# Altium PCB PCB1.PcbDoc
Units mm, origin at the board's own origin, x right, y up, seen from the top; angles counter-clockwise.
Board outline 80.01 x 80.01 mm, 2 copper layers (Top Layer, Bottom Layer); 95 components, 52 nets, 287 pads, 0 vias.
Unrouted connection lines stored in the file: 209.
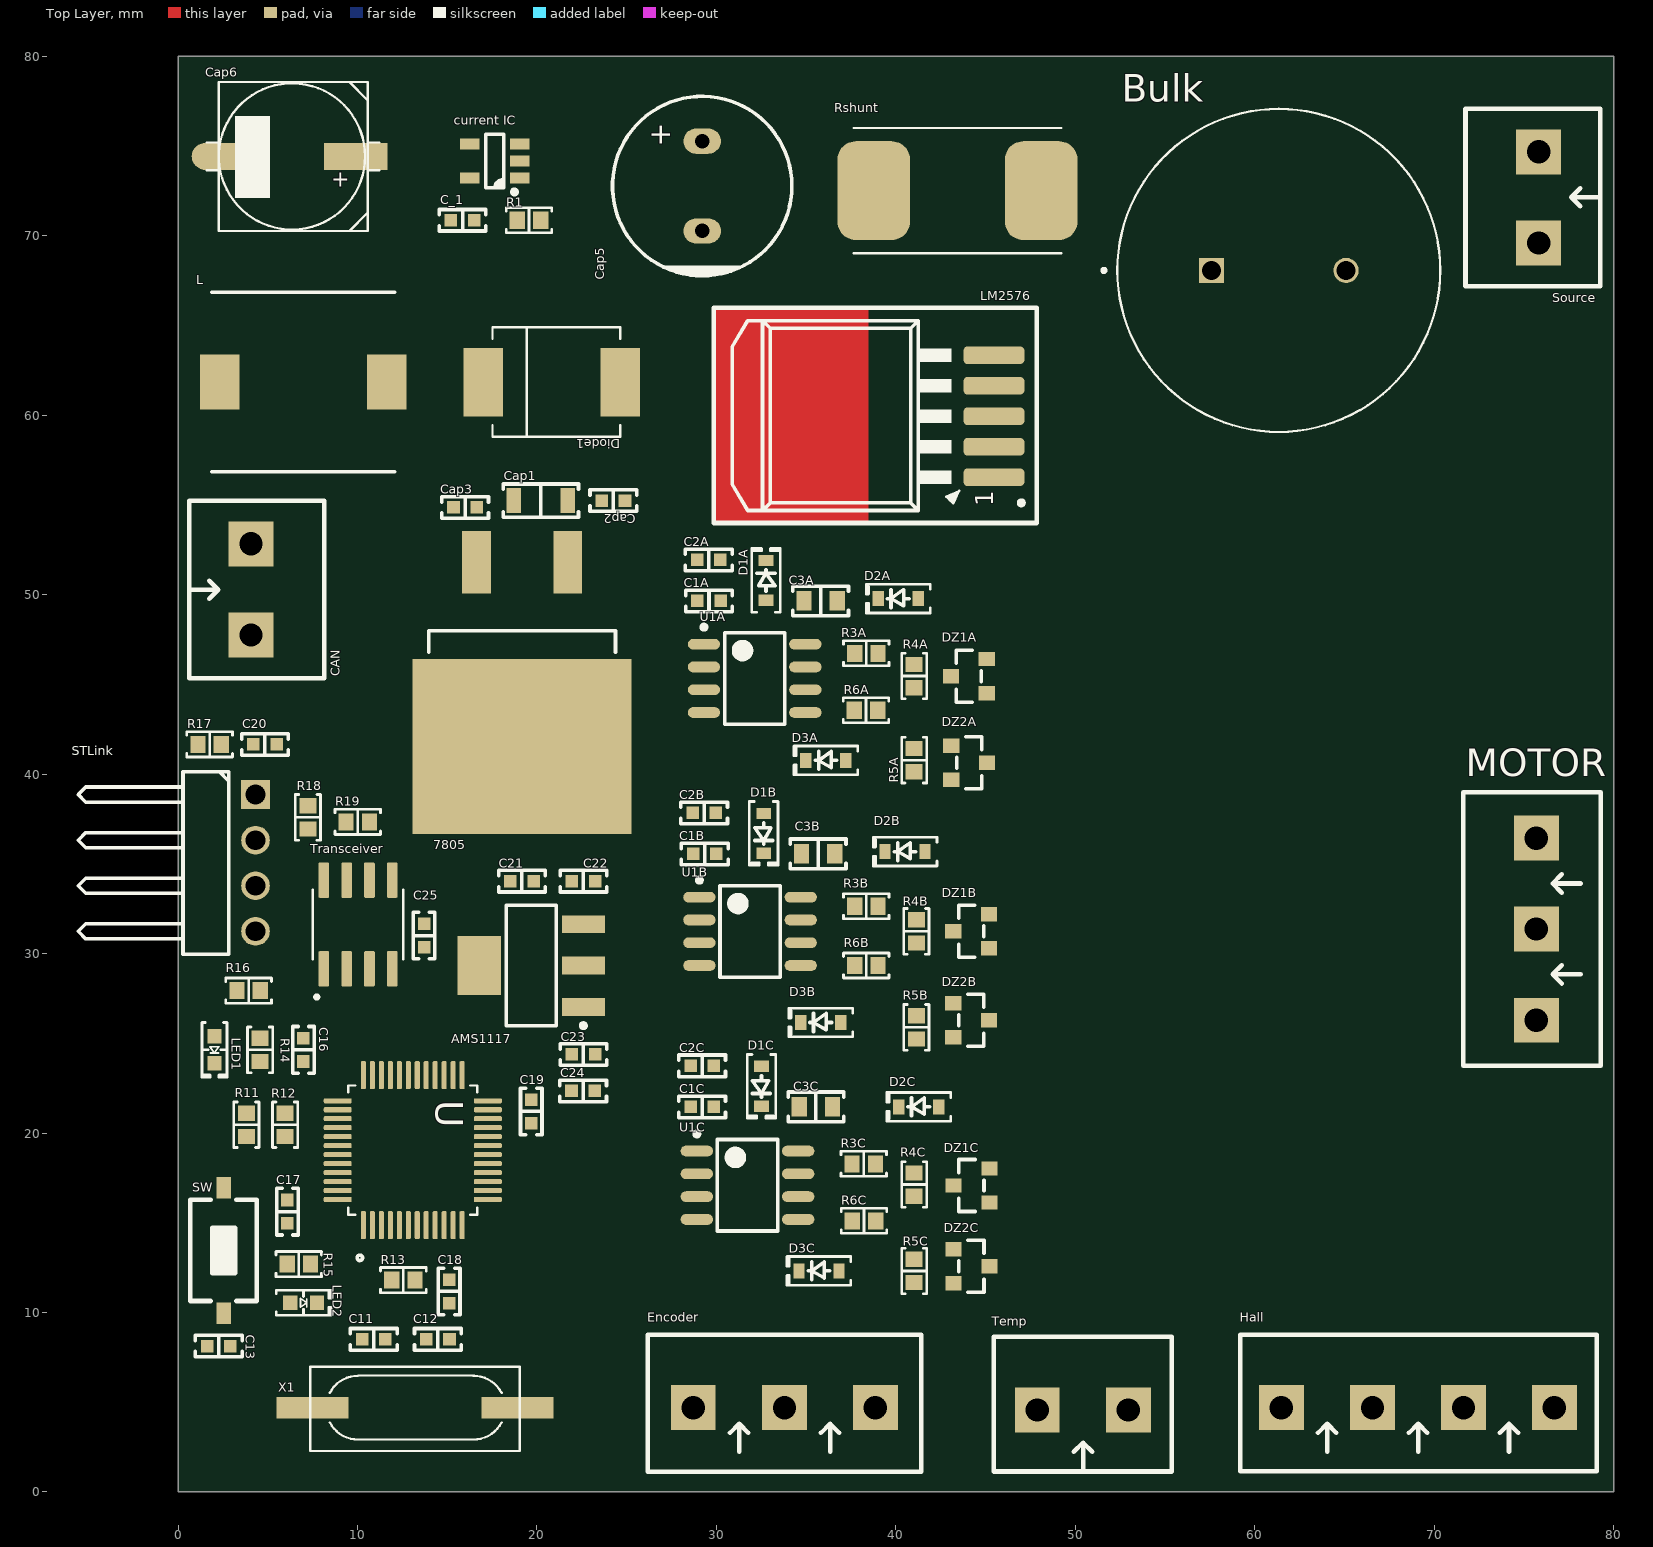
[diagram p0: Top Layer view]
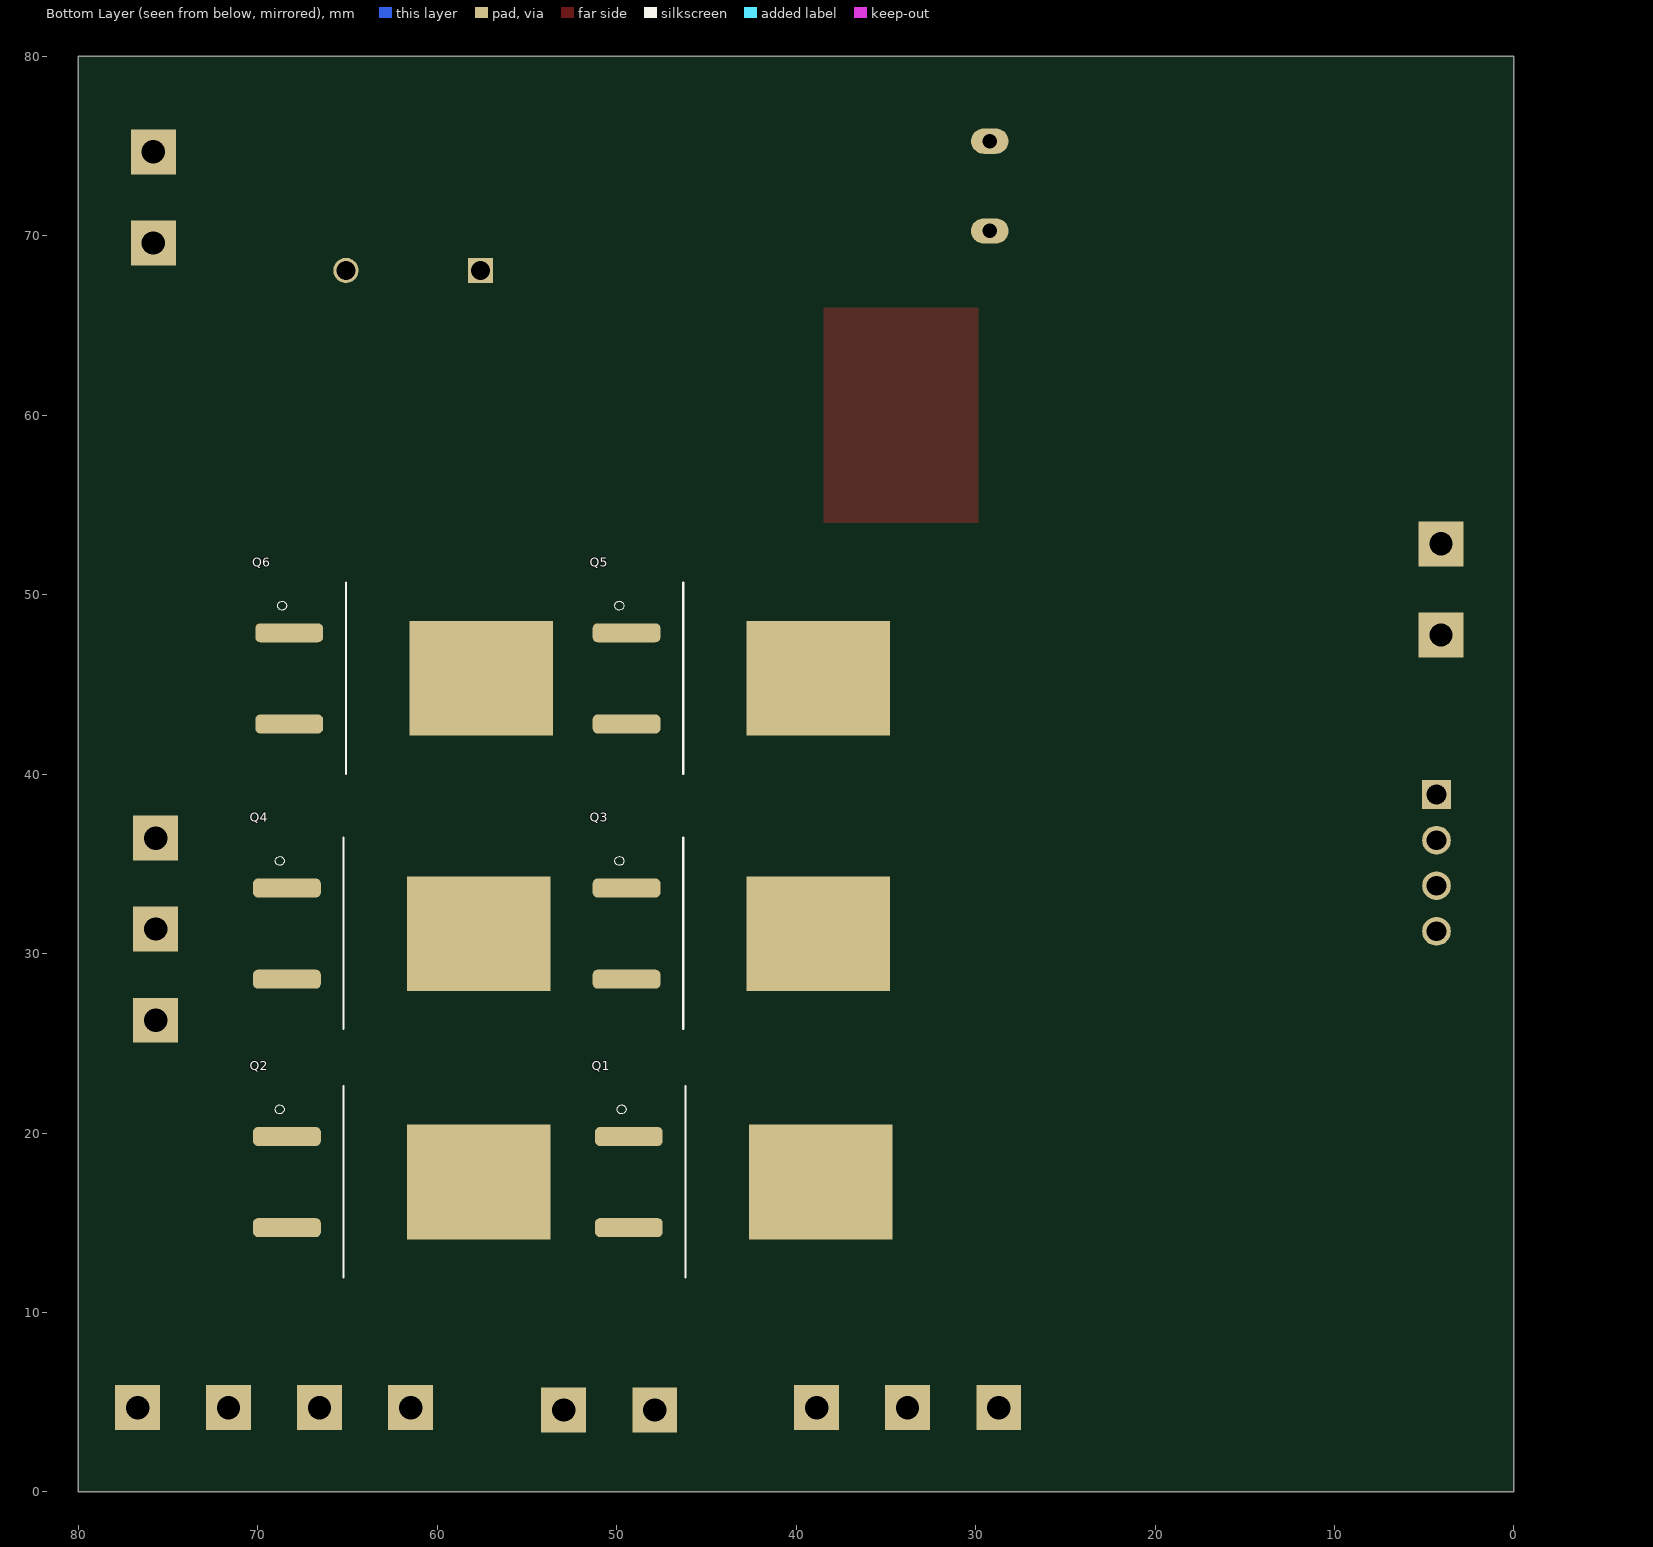
[diagram p1: Bottom Layer view, seen from below]

## Layer stack, top to bottom
Top Solder: solder mask 0.0102, Solder Resist, Dk 3.5
Top Layer: signal copper 0.0356
Dielectric 1: dielectric 0.32, FR-4, Dk 4.8
Bottom Layer: signal copper 0.0356
Bottom Solder: solder mask 0.0102, Solder Resist, Dk 3.5

## Board outline
0,0 80.01,0 80.01,80.01 0,80.01

## Design rules (kind name [scope] priority, off if disabled: settings)
Clearance [All] p1: gap=0.254 ignorepadtopadclearanceinfootprint=TRUE except(0: Arc-Hole Track-Hole SMDPad-Hole THPad-Hole Via-Hole Fill-Hole Poly-Hole Region-Hole Text-Hole)
DiffPairsRouting [All] p1: maxlimit=0.254 minlimit=0.254 mostfreqgap=0.254 toplayer_minwidth=0.381 toplayer_maxwidth=0.381 toplayer_prefwidth=0.381 bottomlayer_minwidth=0.381 bottomlayer_maxwidth=0.381 bottomlayer_prefwidth=0.381 maxuncoupledlength=12.7
PolygonConnect [All] p1: connectstyle=Relief reliefconductorwidth=0.254 reliefentries=4 polygonreliefangle="90 Angle" airgapwidth=0.254
RoutingVias [All] p1: holewidth=0.711 width=1.27 viastyle="Through Hole" minholewidth=0.711 minwidth=1.27 maxholewidth=0.711 maxwidth=1.27
SolderMaskExpansion [All] p1: expansion=0.102
Width [All] p1: maxlimit=0.254 minlimit=0.254 preferedwidth=0.254
29 further rules are at their usual default settings.

## Classes and differential pairs
differential pair class CAN_DIFF: CAN
channel class IC_driver: U_IC_driver1 U_IC_driver2 U_IC_driver3
component class U_Motor: Bulk C_1 "current IC" Encoder Hall MOTOR Q1 Q2 Q3 Q4 Q5 Q6 R1 Rshunt Temp
component class U_MCU: AMS1117 C11 C12 C13 C16 C17 C18 C19 C20 C21 C22 C23 C24 C25 CAN LED1 LED2 R11 R12 R13 R14 R15 R16 R17 R18 R19 STLink SW Transceiver U X1
component class U_IC_driver3: C1C C2C C3C D1C D2C D3C DZ1C DZ2C R3C R4C R5C R6C U1C
component class U_IC_driver2: C1B C2B C3B D1B D2B D3B DZ1B DZ2B R3B R4B R5B R6B U1B
component class U_IC_driver1: C1A C2A C3A D1A D2A D3A DZ1A DZ2A R3A R4A R5A R6A U1A
component class Main: 7805 Cap1 Cap2 Cap3 Cap5 Cap6 Diode1 L LM2576 Source
differential pair CAN: +CAN_P -CAN_N

## Components (designator, comment, footprint, x,y, rotation, side; value= is the part's Value field where it differs from the comment)
7805 "L7805CD2T-TR" STMicroelectronics_D²PAK_0079457_22_MFG 19.177,43.307 r180 top (schematic designator IC1)
AMS1117 "LM1117" SOT223-4N 19.685,29.337 r180 top value=LM317
Bulk "1000uF/100V" CAPPRD750W80D1800H3550 61.341,68.072 r0 top
C1A "104" "CAP FILM 0603_1608" 29.591,49.657 r180 top value=0,1uF/300V (schematic designator C1)
C1B "104" "CAP FILM 0603_1608" 29.352,35.56 r180 top value=0,1uF/300V (schematic designator C1)
C1C "104" "CAP FILM 0603_1608" 29.21,21.463 r0 top value=0,1uF/300V (schematic designator C1)
C2A "104" "CAP FILM 0603_1608" 29.576,51.943 r180 top value=0,1uF/300V (schematic designator C2)
C2B "104" "CAP FILM 0603_1608" 29.322,37.846 r180 top value=0,1uF/300V (schematic designator C2)
C2C "104" "CAP FILM 0603_1608" 29.21,23.749 r0 top value=0,1uF/300V (schematic designator C2)
C3A "10uF" "CAP FILM 0805" 35.814,49.657 r0 top (schematic designator C3)
C3B "10uF" "CAP FILM 0805" 35.672,35.56 r0 top (schematic designator C3)
C3C "10uF" "CAP FILM 0805" 35.545,21.463 r0 top (schematic designator C3)
C11 "22pF" "CAP FILM 0603_1608" 10.907,8.509 r0 top value=33p
C12 "22pF" "CAP FILM 0603_1608" 14.478,8.509 r180 top value=33p
C13 "104" "CAP FILM 0603_1608" 2.271,8.128 r0 top value=0,1uF/300V
C16 "104" "CAP FILM 0603_1608" 6.985,24.638 r90 top value=0,1uF/300V
C17 "104" "CAP FILM 0603_1608" 6.096,15.621 r90 top value=0,1uF/300V
C18 "104" "CAP FILM 0603_1608" 15.113,11.176 r270 top value=0,1uF/300V
C19 "104" "CAP FILM 0603_1608" 19.685,21.209 r270 top value=0,1uF/300V
C20 "104" "CAP FILM 0603_1608" 4.841,41.656 r180 top value=0,1uF/300V
C21 "4.7uF" "CAP FILM 0603_1608" 19.162,34.036 r180 top value=0,1uF/300V
C22 "1uF" "CAP FILM 0603_1608" 22.591,34.036 r0 top value=0,1uF/300V
C23 "4.7uF" "CAP FILM 0603_1608" 22.591,24.384 r180 top value=0,1uF/300V
C24 "1uF" "CAP FILM 0603_1608" 22.576,22.352 r180 top value=0,1uF/300V
C25 "104" "CAP FILM 0603_1608" 13.716,31.003 r270 top value=0,1uF/300V
C_1 "104" "CAP FILM 0603_1608" 15.86,70.866 r0 top value=0,1uF/300V
CAN "KF2" KF2-5.08 4.064,50.292 r90 top
Cap1 "100uF/50V" "CAP FILM 1206" 20.217,55.245 r180 top
Cap2 "104" "CAP FILM 0603_1608" 24.257,55.245 r180 top value=0.1uF
Cap3 "104" "CAP FILM 0603_1608" 16.002,54.864 r0 top value=0.1uF
Cap5 "150uF/100V" "CAP TH ALUM ELEC D10.00mm S5.00mm H20.00mm" 29.21,72.771 r90 top
Cap6 "330uF/25V" CAP-ALU-SMD-F 6.35,74.422 r180 top
"current IC" "INA139" "MICROCHIP SOT-23-5 OT" 17.65,74.168 r180 top
D1A "1N4148" SOD323 32.766,50.8 r90 top value=1N5007 (schematic designator D1)
D1B "1N4148" SOD323 32.639,36.703 r270 top value=1N5007 (schematic designator D1)
D1C "1N4148" SOD323 32.512,22.606 r270 top value=1N5007 (schematic designator D1)
D2A "1N4148" SOD323 40.132,49.784 r180 top value=1N5007 (schematic designator D2)
D2B "1N4148" SOD323 40.513,35.687 r180 top value=1N5007 (schematic designator D2)
D2C "1N4148" SOD323 41.275,21.463 r180 top value=1N5007 (schematic designator D2)
D3A "1N4148" SOD323 36.099,40.767 r180 top value=1N5007 (schematic designator D3)
D3B "1N4148" SOD323 35.814,26.162 r180 top value=1N5007 (schematic designator D3)
D3C "1N4148" SOD323 35.718,12.319 r180 top value=1N5007 (schematic designator D3)
Diode1 "1N5822" DIO-SMD-B 20.828,61.849 r0 top value=1N5007
DZ1A "DIODE Zener" "DIODES SOT-23-3" 44.069,45.466 r180 top (schematic designator DZ1)
DZ1B "DIODE Zener" "DIODES SOT-23-3" 44.196,31.242 r180 top (schematic designator DZ1)
DZ1C "DIODE Zener" "DIODES SOT-23-3" 44.212,17.079 r180 top (schematic designator DZ1)
DZ2A "DIODE Zener" "DIODES SOT-23-3" 44.085,40.64 r0 top (schematic designator DZ2)
DZ2B "DIODE Zener" "DIODES SOT-23-3" 44.196,26.289 r0 top (schematic designator DZ2)
DZ2C "DIODE Zener" "DIODES SOT-23-3" 44.212,12.573 r0 top (schematic designator DZ2)
Encoder "KF3" KF3-5.08 28.715,4.699 r0 top
Hall "KF4" KF4-5.08 61.481,4.699 r0 top
L "100uH/3A" INDPM102100X400N 6.985,61.849 r0 top
LED1 "LED SMD" "LED 0603_1608 GREEN" 2.032,24.638 r270 top
LED2 "LED SMD" "LED 0603_1608 GREEN" 6.997,10.541 r0 top
LM2576 "LM2576" TO263 39.497,59.563 r90 top (schematic designator IC2)
MOTOR "KF3" KF3-5.08 75.692,26.289 r90 top
Q1 "IRFZ44" DPAK508P1524X483-3N 42.926,17.272 r270 bottom
Q2 "IRFZ44" DPAK508P1524X483-3N 61.976,17.272 r270 bottom
Q3 "IRFZ44" DPAK508P1524X483-3N 43.053,31.115 r270 bottom
Q4 "IRFZ44" DPAK508P1524X483-3N 61.976,31.115 r270 bottom
Q5 "IRFZ44" DPAK508P1524X483-3N 43.053,45.339 r270 bottom
Q6 "IRFZ44" DPAK508P1524X483-3N 61.849,45.339 r270 bottom
R1 "100k" "RES 0603_1608" 19.558,70.866 r0 top value="R1/4W - 1K"
R3A "10" "RES 0603_1608" 38.354,46.736 r0 top value="R1/4W - 1K" (schematic designator R3)
R3B "10" "RES 0603_1608" 38.354,32.639 r0 top value="R1/4W - 1K" (schematic designator R3)
R3C "10" "RES 0603_1608" 38.212,18.288 r0 top value="R1/4W - 1K" (schematic designator R3)
R4A "4.7k" "RES 0603_1608" 41.021,45.466 r90 top value="R1/4W - 1K" (schematic designator R4)
R4B "4.7k" "RES 0603_1608" 41.148,31.242 r90 top value="R1/4W - 1K" (schematic designator R4)
R4C "4.7k" "RES 0603_1608" 41.021,17.13 r90 top value="R1/4W - 1K" (schematic designator R4)
R5A "10" "RES 0603_1608" 41.021,40.782 r90 top value="R1/4W - 1K" (schematic designator R5)
R5B "10" "RES 0603_1608" 41.148,25.893 r90 top value="R1/4W - 1K" (schematic designator R5)
R5C "10" "RES 0603_1608" 41.021,12.319 r90 top value="R1/4W - 1K" (schematic designator R5)
R6A "4.7k" "RES 0603_1608" 38.339,43.561 r180 top value="R1/4W - 1K" (schematic designator R6)
R6B "4.7k" "RES 0603_1608" 38.354,29.337 r180 top value="R1/4W - 1K" (schematic designator R6)
R6C "4.7k" "RES 0603_1608" 38.227,15.113 r180 top value="R1/4W - 1K" (schematic designator R6)
R11 "10k" "RES 0603_1608" 3.81,20.462 r270 top value="R1/4W - 1K"
R12 "10k" "RES 0603_1608" 5.969,20.462 r90 top value="R1/4W - 1K"
R13 "1M" "RES 0603_1608" 12.558,11.811 r180 top value="R1/4W - 1K"
R14 "10k" "RES 0603_1608" 4.572,24.638 r270 top value="R1/4W - 1K"
R15 "10k" "RES 0603_1608" 6.731,12.7 r180 top value="R1/4W - 1K"
R16 "10k" "RES 0603_1608" 3.937,27.94 r180 top value="R1/4W - 1K"
R17 "10k" "RES 0603_1608" 1.763,41.656 r0 top value="R1/4W - 1K"
R18 "10k" "RES 0603_1608" 7.239,37.592 r270 top value="R1/4W - 1K"
R19 "120" "RES 0603_1608" 10.018,37.338 r0 top value="R1/4W - 1K"
Rshunt "1mOhms/3W" RESM11569X253N 43.434,72.517 r0 top
Source "KF2" KF2-5.08 75.819,72.136 r270 top
STLink "JP4" JP4-D1C 1.778,29.972 r270 top
SW "" SW1-SMD 2.54,13.462 r270 top value="SW chip 2 pin"
Temp "KF2" KF2-5.08 50.419,4.572 r180 top
Transceiver "SN65HVD230QDR" SOIC127P599X175-8N 10.033,31.623 r90 top
U "STM32F103C8T6" QFP50P900X900X160-48N 13.081,19.05 r90 top
U1A "IR2101" SO8 32.131,45.339 r0 top (schematic designator U1)
U1B "IR2101" SO8 31.877,31.242 r0 top (schematic designator U1)
U1C "IR2101" SO8 31.735,17.094 r0 top (schematic designator U1)
X1 "8Mhz" XTAL-RU49/4 18.161,4.699 r180 top value=4Mhz

## Footprints (in the part's own frame and the unit in brackets; to place one, negate y for a bottom-side part, rotate by r counter-clockwise, add the part's x,y. Pads: shape width x height; smd on the part's side, far side on the other; paste and mask are expansions set on the pad)
"CAP FILM 0603_1608" [mm] "Chip Capacitor, 2-Leads, Body 1.60x0.80mm, IPC Medium Density"
  rect 0.7x0.7 smd: 1(-0.65,0) 2(0.65,0)
  silkscreen extent -1.3,-0.6 1.3,0.6, body extent -0.8,-0.4 0.8,0.4, height 0.7
"CAP FILM 0805" [mm] "J2, Film Capacitor PPS , 2-Leads, Body 2.00x1.25mm, IPC Medium Density"
  rect 0.85x1.1 smd: 1(-0.925,0) 2(0.925,0)
  silkscreen extent -1.55,-0.82 1.55,0.82, body extent -1,-0.62 1,0.62, height 1.2
"CAP FILM 1206" [mm] "H1, Film Capacitor PPS, 2-Leads, Body 3.20x1.60mm, IPC Medium Density"
  rect 0.8x1.4 smd: 1(-1.5,0) 2(1.5,0)
  silkscreen extent -2.1,-0.92 2.1,0.92, body extent -1.6,-0.8 1.6,0.8, height 1
"CAP TH ALUM ELEC D10.00mm S5.00mm H20.00mm" [mm] "10mm Diameter 5mm Lead Spacing Aluminum Electrolytic Capacitors Radial, Can"
  oval 1.4x2.1 hole 0.8: 1(2.5,0) 2(-2.5,0)
  silkscreen extent -5,-5 5,5, body extent -5.01,-5 5,5, height 20
CAP-ALU-SMD-F [mil]
  rect 140x59.06 smd: 1(-140,0)
  oval 140x59.06 smd: 2(150,0)
  silkscreen extent -192,-163 187,163, body extent -195,-163 195,163, height 402
CAPPRD750W80D1800H3550 [mm]
  round 1.4 hole 1.05: N(3.75,0)
  rect 1.4x1.4 hole 1.05: P(-3.75,0)
  silkscreen extent -9.85,-9 9,9, body extent -9,-9 9,9, height 35.5
DIO-SMD-B [mm] "Magnetic-Core Inductor with Winding Polarity Marking; 2 Leads"
  rect 2.2x3.81 smd: 1(3.81,0) 2(-3.81,0)
  silkscreen extent -3.3,-3.05 3.81,3.05, body extent -3.94,-3.08 3.96,2.92, height 2.13
"DIODES SOT-23-3" [mm] "SOT23, 3-Leads, Body 2.90x2.40mm, Pitch 0.95mm, IPC Medium Density"
  rect 0.9x0.8 smd: 1(-1,0.95) 2(-1,-0.95) 3(1,0)
  silkscreen extent -0.7,-1.45 0.7,1.45, body extent -1.41,-1.45 1.41,1.45, height 1.5
DPAK508P1524X483-3N [mm]
  rrect53% 1.06x3.78 smd: 1(-2.54,-6.4) 3(2.54,-6.4)
  rect 6.39x8 smd paste-5 mask+0: 2(0,4.29)
  silkscreen extent -5.34,-7.05 5.32,-3.24, body extent -5.08,-6.86 5.08,8.38, height 4.83
INDPM102100X400N [mm]
  rect 2.2x3.05 smd: 1(-4.65,0) 2(4.65,0)
  silkscreen extent -5.1,-5 5.1,5, body extent -5.1,-5 5.1,5, height 4
JP4-D1C [mm] "4 pins, 1 row, right angled, gold plating"
  rect 1.6x1.6 hole 1.1: 1(-8.89,2.54)
  round 1.6 hole 1.1: 2(-6.35,2.54) 3(-3.81,2.54) 4(-1.27,2.54)
  silkscreen extent -10.16,-7.34 0,1.04, body extent -10.16,-7.57 0,2.79, height 2.54
KF2-5.08 [mm]
  rect 2.5x2.5 hole 1.3: 1(-2.54,0) 2(2.54,0)
  silkscreen extent -4.95,-4.08 4.95,3.43, body extent -5,-4.07 5,3.43, height 10
KF3-5.08 [mm]
  rect 2.5x2.5 hole 1.3: 1(0,0) 2(5.08,0) 3(10.147,0)
  silkscreen extent -2.54,-3.58 12.7,4.06, body extent -2.42,-3.51 12.58,3.99, height 10
KF4-5.08 [mm]
  rect 2.5x2.5 hole 1.3: 1(0,0) 2(5.08,0) 3(10.147,0) 4(15.215,0)
  silkscreen extent -2.29,-3.53 17.58,4.06, body extent -2.36,-3.43 17.64,4.07, height 10
"LED 0603_1608 GREEN" [mm] "Chip Diode, 2-Leads, Body 1.60x0.80mm, IPC Medium Density"
  rect 0.8x0.8 smd: 1(-0.75,0) 2(0.75,0)
  silkscreen extent -1.52,-0.7 1.52,0.7, body extent -0.8,-0.4 0.8,0.4, height 0.53
"MICROCHIP SOT-23-5 OT" [mm] "SOT23, 5-Leads, Body 2.90x2.70mm, Pitch 0.95mm, IPC Medium Density"
  rect 1.1x0.6 smd: 1(-1.4,0.95) 2(-1.4,0) 3(-1.4,-0.95) 4(1.4,-0.95) 5(1.4,0.95)
  silkscreen extent -1.23,-1.5 0.5,1.85, body extent -1.36,-1.45 1.36,1.45, height 1.19
QFP50P900X900X160-48N [mm]
  rrect50% 1.56x0.28 smd: 1(-4.18,2.75) 2(-4.18,2.25) 3(-4.18,1.75) 4(-4.18,1.25) 5(-4.18,0.75) 6(-4.18,0.25) 7(-4.18,-0.25) 8(-4.18,-0.75) 9(-4.18,-1.25) 10(-4.18,-1.75) 11(-4.18,-2.25) 12(-4.18,-2.75) 25(4.18,-2.75) 26(4.18,-2.25) 27(4.18,-1.75) 28(4.18,-1.25) 29(4.18,-0.75) 30(4.18,-0.25) 31(4.18,0.25) 32(4.18,0.75) 33(4.18,1.25) 34(4.18,1.75) 35(4.18,2.25) 36(4.18,2.75)
  rrect50% 0.28x1.56 smd: 13(-2.75,-4.18) 14(-2.25,-4.18) 15(-1.75,-4.18) 16(-1.25,-4.18) 17(-0.75,-4.18) 18(-0.25,-4.18) 19(0.25,-4.18) 20(0.75,-4.18) 21(1.25,-4.18) 22(1.75,-4.18) 23(2.25,-4.18) 24(2.75,-4.18) 37(2.75,4.18) 38(2.25,4.18) 39(1.75,4.18) 40(1.25,4.18) 41(0.75,4.18) 42(0.25,4.18) 43(-0.25,4.18) 44(-0.75,4.18) 45(-1.25,4.18) 46(-1.75,4.18) 47(-2.25,4.18) 48(-2.75,4.18)
  silkscreen extent -6.15,-3.6 3.6,3.6
"RES 0603_1608" [mm] "Chip Resistor, 2-Leads, Body 1.60x0.80mm, IPC Medium Density"
  rect 0.85x0.95 smd: 1(-0.65,0) 2(0.65,0)
  silkscreen extent -1.27,-0.7 1.27,0.7, body extent -0.8,-0.4 0.8,0.4, height 0.45
RESM11569X253N [mm]
  rrect50% 4.04x5.51 smd: 1(-4.665,0) 2(4.665,0)
  silkscreen extent -5.78,-3.49 5.78,3.49
SO8 [mm] "SOIC, 8-Leads, Body 4.9x3.9mm, Pitch 1.27mm, IPC High Density"
  oval 1.8x0.6 smd: 1(-2.825,1.905) 2(-2.825,0.635) 3(-2.825,-0.635) 4(-2.825,-1.905) 5(2.825,-1.905) 6(2.825,-0.635) 7(2.825,0.635) 8(2.825,1.905)
  silkscreen extent -2.95,-2.55 1.68,2.98, body extent -2.99,-2.45 3,2.45, height 1.6
SOD323 [mm] "SOD, 2-Leads, Body 1.25x2.50mm, IPC Medium Density"
  rect 0.625x0.83 smd: 1(-1.112,0) 2(1.112,0)
  silkscreen extent -1.78,-0.8 1.78,0.8, body extent -1.36,-0.62 1.36,0.62, height 1.05
SOIC127P599X175-8N [mm]
  rrect25% 1.97x0.6 smd: 1(-2.47,1.905) 2(-2.47,0.635) 3(-2.47,-0.635) 4(-2.47,-1.905) 5(2.47,-1.905) 6(2.47,-0.635) 7(2.47,0.635) 8(2.47,1.905)
  silkscreen extent -4.14,-2.52 1.95,2.52, body extent -3,-2.45 3,2.45, height 1.75
SOT223-4N [mm] "SOT223, 4-Leads, Body 6.5x3.5mm, Pitch 2.3mm, Lead Span 7mm, IPC Medium Density"
  rect 2.4x1 smd: 1(-2.9,2.3) 2(-2.9,0) 3(-2.9,-2.3)
  rect 2.4x3.3 smd: 4(2.9,0)
  silkscreen extent -3.03,-3.35 1.4,3.47, body extent -3.39,-3.27 3.5,3.23, height 1.72
STMicroelectronics_D²PAK_0079457_22_MFG [mm]
  rect 1.6x3.5 smd paste+0 mask+0: 1(-2.54,-8.503) 3(2.54,-8.503)
  rect 12.2x9.75 smd paste+0 mask+0: 4(0,1.773)
  silkscreen extent -5.2,-4.67 5.2,-3.48, body extent -6.2,-10.35 6.2,6.75, height 0.25
SW1-SMD [mm]
  rect 1.2x0.8 smd: 1(-3.5,0) 2(3.5,0)
  silkscreen extent -2.82,-1.85 2.82,1.85, body extent -3.05,-1.85 3.05,1.85, height 2.5
TO263 [mm]
  rrect50% 1x3.4 smd: 1(-3.019,-5.969) 2(-1.319,-5.969) 4(2.081,-5.969) 5(3.781,-5.969)
  rrect50% 1x3.4 smd mask+0: 3(0.381,-5.969)
  Top Layer region: -5.568,1.016 6.432,1.016 6.432,9.65 -5.568,9.65
  silkscreen extent -5.57,-8.35 6.43,9.65, body extent -4.73,-6.84 5.43,7.8, height 4.57
XTAL-RU49/4 [mm]
  rect 4x1.2 smd: 1(-0.762,0) 2(10.668,0)
  silkscreen extent -0.89,-2.29 10.8,2.41, body extent -1.2,-2.22 11.1,2.48, height 4.3

## Part data
AMS1117: "Available in 1.8V, 2.5V, 2.85V, 3.3V, 5V, and  Adjustable Versions"
Bulk: library part ECA2AHG102E, "Aluminum Electrolytic Capacitors, NHG-A Series, 1000uF +/- 20%, 100V, Radial lead type(18x35.5mm)", Package="RADIAL-2 Panasonic", Availability="In Stock", Check_prices=https://www.snapeda.com/parts/ECA-2AHG102E/Panasonic/view-part/6221685/?ref=eda, MF=Panasonic, MP=ECA-2AHG102E, Price=None, SnapEDA_Link=https://www.snapeda.com/parts/ECA-2AHG102E/Panasonic/view-part/6221685/?ref=snap
C1A C1B C1C C2A C2B C2C C13 C16 C17 C18 C19 C20 C21 C22 C23 C24 C25 C_1: library part CN, Designed by=VanDungEvn
C3A C3B C3C Cap1 Cap5 Cap6: library part CN-ALU-SMD, "Polarized Capacitor (Axial)", LatestRevisionDate=17-Jul-2002, LatestRevisionNote="Re-released for DXP Platform.", PackageReference=POLAR0.8, Published=8-Jun-2000, Publisher="Altium Limited"
C11 C12: library part CapSMD, "Capacitor", LatestRevisionDate=17-Jul-2002, LatestRevisionNote="Re-released for DXP Platform.", PackageReference=RAD-0.3, Published=8-Jun-2000, Publisher="Altium Limited"
CAN Source Temp: Manufacturer="Würth Elektronik eiSos GmbH", partNo=691103110002, ComponentLink1 Description=Manufacturer, ComponentLink1URL=http://www.we-online.com, ComponentLink2 Description=Datasheet, ComponentLink2URL=http://katalog.we-online.de/em/datasheet/6911031100xx.pdf, Created by="Karrer Zheng", Created Date="29 October 2013", NoPins=2
Cap2 Cap3: library part CN2, "Cap np 104 => 105pF"
"current IC": "Current Monitor Regulator High-Side SOT-23-5", Package="SOT-23-5 Texas Instruments", Availability=Unavailable, MF="Texas Instruments", MP=INA139, Price=None, SnapEDA_Link=https://www.snapeda.com/parts/INA139/Texas%20Instruments/view-part/560986/?ref=snap
D1A D1B D1C D2A D2B D2C D3A D3B D3C Diode1: library part "Diode SMD", "Default Diode", Code - JEDEC=DO-214-AB, Published=8-Jun-2000, Publisher="Altium Limited", Revision="July-2002: Re-released for DXP Platform."
DZ1A DZ1B DZ1C DZ2A DZ2B DZ2C: "Zenner"
Encoder MOTOR: Manufacturer="Würth Elektronik eiSos GmbH", partNo=691103110003, ComponentLink1 Description=Manufacturer, ComponentLink1URL=http://www.we-online.com, ComponentLink2 Description=Datasheet, ComponentLink2URL=http://katalog.we-online.de/em/datasheet/6911031100xx.pdf, Created by="Karrer Zheng", Created Date="29 October 2013", NoPins=3
Hall: Manufacturer="W¨¹rth Elektronik eiSos GmbH", partNo=691133710004, ComponentLink1 Description=Manufacturer, ComponentLink1 URL=http://www.we-online.com, ComponentLink2 Description=Datasheet, ComponentLink2 URL=http://katalog.we-online.de/em/datasheet/6911337100xx.pdf, Created by="Baojun Chen", Created Date=4-Aug-15, NoPins=4
L: library part CDRH104RNP-680NC, "Inductor", Manufacturer_Name=Sumida, Mouser Part Number=851-CDRH104RNP-680NC, Arrow Part Number=CDRH104RNP-680NC, Arrow Price/Stock=https://www.arrow.com/en/products/cdrh104rnp-680nc/sumida, Datasheet Link=http://products.sumida.com/products/pdf/CDRH104,104R.pdf, Height=4mm, Manufacturer_Part_Number=CDRH104RNP-680NC, Mouser Price/Stock=https://www.mouser.co.uk/ProductDetail/Sumida/CDRH104RNP-680NC/?qs=b6HGhii3QUSW0bjw2331%2Fg%3D%3D
LED1 LED2: library part LED-SMD-0805
LM2576: library part LM2596, Max Input Voltage="12 V", Max Output Current="3 (6.0 peak) A", Max Output Voltage=mV, Temperature Range="-40 to +125 degC", Category=IC-Power, Min Input Voltage=mV, Min Output Voltage=mV, Mounting Technology="Surface Mount", Status=Unreleased, Supply Voltage=mV
Q1 Q2 Q3 Q4 Q5 Q6: "HEXFET N-Channel Power MOSFET"
R1 R3A R3B R3C R4A R4B R4C R5A R5B R5C R6A R6B R6C R11 R12 R13 R14 R15 R16 R17 R18 R19: library part R, "Resistor 1/4W"
Rshunt: library part WSR31L000FEA, "3 mOhms ±1% 5W Chip Resistor 4527 J-Lead Anti-Sulfur, Automotive AEC-Q200, Current Sense, Moisture Resistant, Pulse Withstanding Metal Element", Package=None, Availability=Unavailable, MP=WSR31L000FEA, Price=None
STLink: "WR-PHD 2.54 mm Angled Socket Header", Manufacturer="W¨¹rth Elektronik eiSos GmbH", partNo=613004143121, ComponentLink1 Description=Manufacturer, ComponentLink1URL=http://www.we-online.com, ComponentLink2 Description=Datasheet, ComponentLink2URL=http://katalog.we-online.de/em/datasheet/6130xx143121.pdf, Created by="Karrer Zheng", Created Date="29 March 2013", NoPins=04
SW: library part SW2, "Switch button 2 pin"
Transceiver: "3.3-V CAN Transceiver with Standby Mode 8-SOIC -40 to 125", Package="SOIC-8 Texas Instruments", Availability=Good, Check_prices=https://www.snapeda.com/parts/SN65HVD230QDR/Texas%20Instruments/view-part/1178075/?ref=eda, MF="Texas Instruments", MP=SN65HVD230QDR, Price=None, Purchase-URL=https://pricing.snapeda.com/search/part/SN65HVD230QDR/?ref=eda, SnapEDA_Link=https://www.snapeda.com/parts/SN65HVD230QDR/Texas%20Instruments/view-part/1178075/?ref=snap
U: "ARM® Cortex®-M3 STM32F1 Microcontroller IC 32-Bit 72MHz 64KB _64K x 8_ FLASH", Package="LQFP-48 STMicroelectronics", Availability=Unavailable, MF=STMicroelectronics, MP=STM32F103C8T6, Price=None, SnapEDA_Link=https://www.snapeda.com/parts/STM32F103C8T6/STMicroelectronics/view-part/52195/?ref=snap
U1A U1B U1C: library part IR2101S, "Half-Bridge Driver"
X1: library part XT2, "Crystal, 32.768 KHz, -40 to 85 degC, 3.2 x 1.5 x 0.9 mm SMD"

## Nets (pads, with @x,y where several pads share a name; then routed paths per layer and width w, separated by ;. In a path a pad name is that pad's centre, name@x,y a point inside that pad or via, vN(x,y) a via of type N, cw(c..) or ccw(c..) an arc to the next point about the centre after c; other vN are vias at no path point)
+3v3: AMS1117.2 C16.1 C17.1 C18.1 C19.1 C20.1 C23.1 C24.1 R11.2 R14.2 R15.2 R17.2 STLink.1 U.9 U.24 U.36 U.48
+5: 7805.3 "current IC.5" AMS1117.3 C21.1 C22.1 C25.1 C_1.1 Cap3.2 Transceiver.3
+12: 7805.1 C1A.2 C1B.2 C1C.2 C2A.2 C2B.2 C2C.2 Cap1.1 Cap2.2 Cap6.1 D1A.1 D1B.1 D1C.1 L.1 LM2576.4 U1A.1 U1B.1 U1C.1
+60: "current IC.3" Bulk.P Cap5.1 LM2576.1 Rshunt.2 Source.1
-: "current IC.4" Q1.2 Q3.2 Q5.2 Rshunt.1
CAN_N: CAN.2 R19.2 Transceiver.6
CAN_P: CAN.1 R19.1 Transceiver.7
CAN_RX: Transceiver.4 U.32
CAN_TX: Transceiver.1 U.33
Current: "current IC.1" R1.2 U.18
Encoder_A: Encoder.2 U.42
Encoder_Z: Encoder.3 U.43
GND: 7805.4 "current IC.2" AMS1117.1 Bulk.N C1A.1 C1B.1 C1C.1 C2A.1 C2B.1 C2C.1 C11.1 C12.1 C13.2 C16.2 C17.2 C18.2 C19.2 C20.2 C21.2 C22.2 C23.2 C24.2 C25.2 C_1.2 Cap1.2 Cap2.1 Cap3.1 Cap5.2 Cap6.2 Diode1.1 DZ2A.1 DZ2B.1 DZ2C.1 Encoder.1 Hall.1 LED1.2 LM2576.3 LM2576.5 Q2.3 Q4.3 Q6.3 R1.1 R6A.1 R6B.1 R6C.1 R12.2 R16.2 R18.1 Source.2 STLink.4 SW.1 Temp.2 Transceiver.2 U1A.4 U1B.4 U1C.4 U.8 U.23 U.35 U.47
H_1: U1C.2 U.10
H_2: U1B.2 U.12
H_3: U1A.2 U.16
Hall_1: Hall.2 U.25
Hall_2: Hall.3 U.26
Hall_3: Hall.4 U.27
HO_1: D2C.1 DZ1C.2 Q1.1 R3C.2 R4C.2
HO_2: D2B.1 DZ1B.2 Q3.1 R3B.2 R4B.2
HO_3: D2A.1 DZ1A.2 Q5.1 R3A.2 R4A.2
HOA: D2A.2 R3A.1 U1A.7
HOB: D2B.2 R3B.1 U1B.7
HOC: D2C.2 R3C.1 U1C.7
L_1: U1C.3 U.11
L_2: U1B.3 U.13
L_3: U1A.3 U.17
LO_1: D3C.1 DZ2C.2 Q2.1 R5C.2 R6C.2
LO_2: D3B.1 DZ2B.2 Q4.1 R5B.2 R6B.2
LO_3: D3A.1 DZ2A.2 Q6.1 R5A.2 R6A.2
LOA: D3A.2 R5A.1 U1A.5
LOB: D3B.2 R5B.1 U1B.5
LOC: D3C.2 R5C.1 U1C.5
NetC3A_1: C3A.1 D1A.2 U1A.8
NetC3B_1: C3B.1 D1B.2 U1B.8
NetC3C_1: C3C.1 D1C.2 U1C.8
NetDiode1_2: Diode1.2 L.2 LM2576.2
NetLED1_1: LED1.1 R14.1
NetLED2_1: LED2.1 R15.1
NetR12_1: R12.1 U.44
NetR18_2: R18.2 Transceiver.8
OSC_in: C11.2 R13.2 U.5 X1.2
OSC_out: C12.2 R13.1 U.6 X1.1
P1: C3C.2 DZ1C.1 MOTOR.1 Q1.3 Q2.2 R4C.1 U1C.6
P2: C3B.2 DZ1B.1 MOTOR.2 Q3.3 Q4.2 R4B.1 U1B.6
P3: C3A.2 DZ1A.1 MOTOR.3 Q5.3 Q6.2 R4A.1 U1A.6
PC13: LED2.2 U.2
RESET: C13.1 R11.1 SW.2 U.7
SWCLK: R17.1 STLink.3 U.37
SWDIO: R16.1 STLink.2 U.34
Temerature: Temp.1 U.19
pads on no net: AMS1117.4 DZ1A.3 DZ1B.3 DZ1C.3 DZ2A.3 DZ2B.3 DZ2C.3 Transceiver.5 U.1 U.3 U.4 U.14 U.15 U.20 U.21 U.22 U.28 U.29 U.30 U.31 U.38 U.39 U.40 U.41 U.45 U.46

## Text inside footprints (layer, text, board x,y; h text height)
Cap5: Top Overlay "+" at 27.81,74.971 h2 r90
Cap6: Top Overlay "+" at 9.575,73.522 h0.89 r180
LM2576: Top Overlay "1" at 45.415,54.918 h1 r90